# EAGLE board drill-rev-1_p (EAGLE 6.5.0)
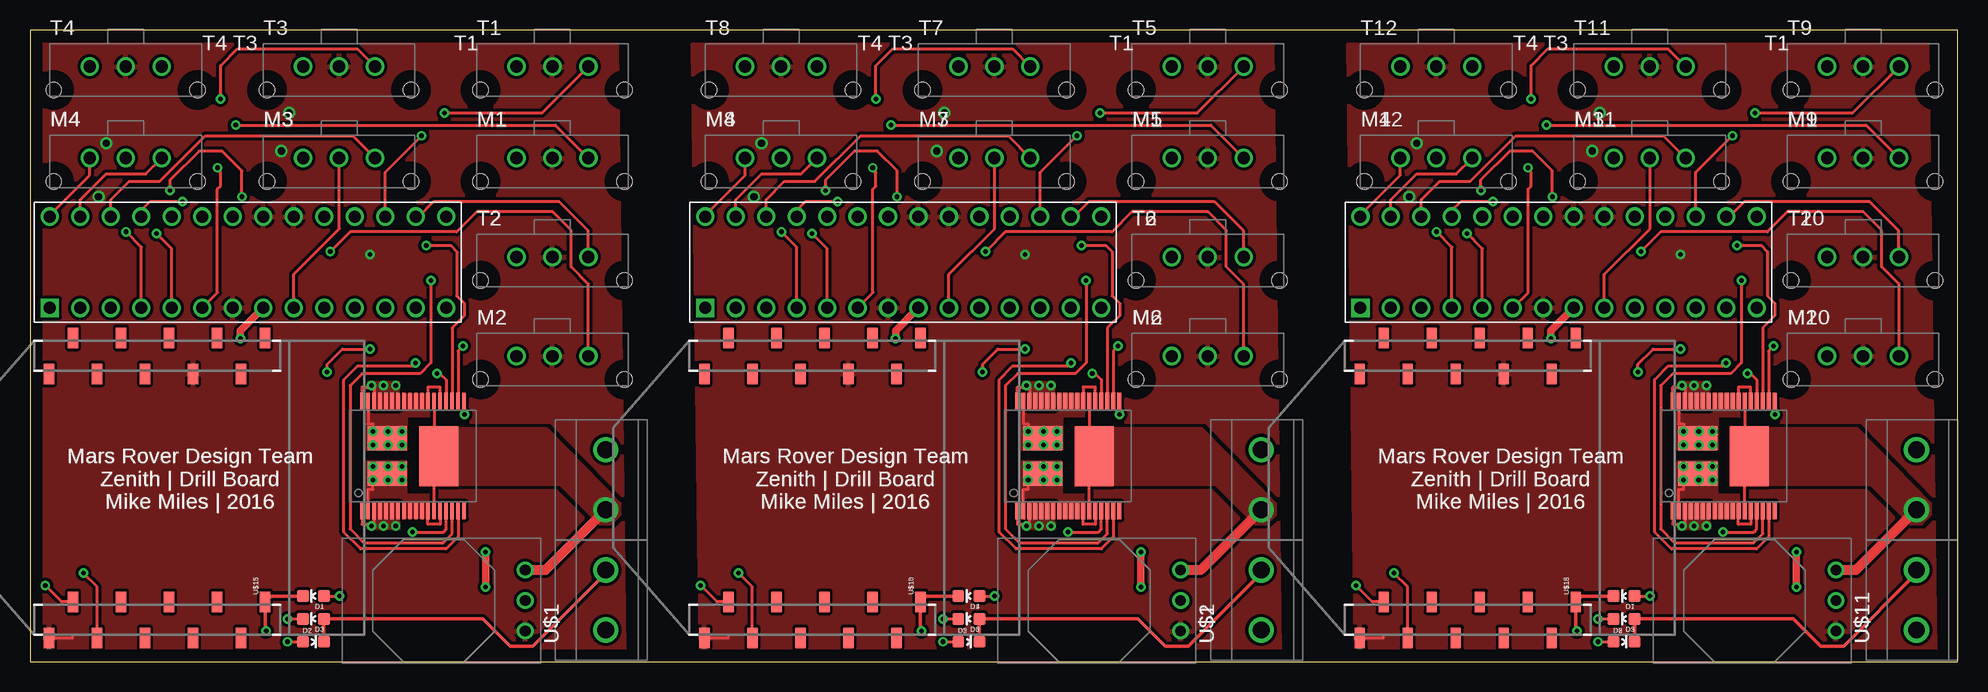
[diagram p0: board, top side]
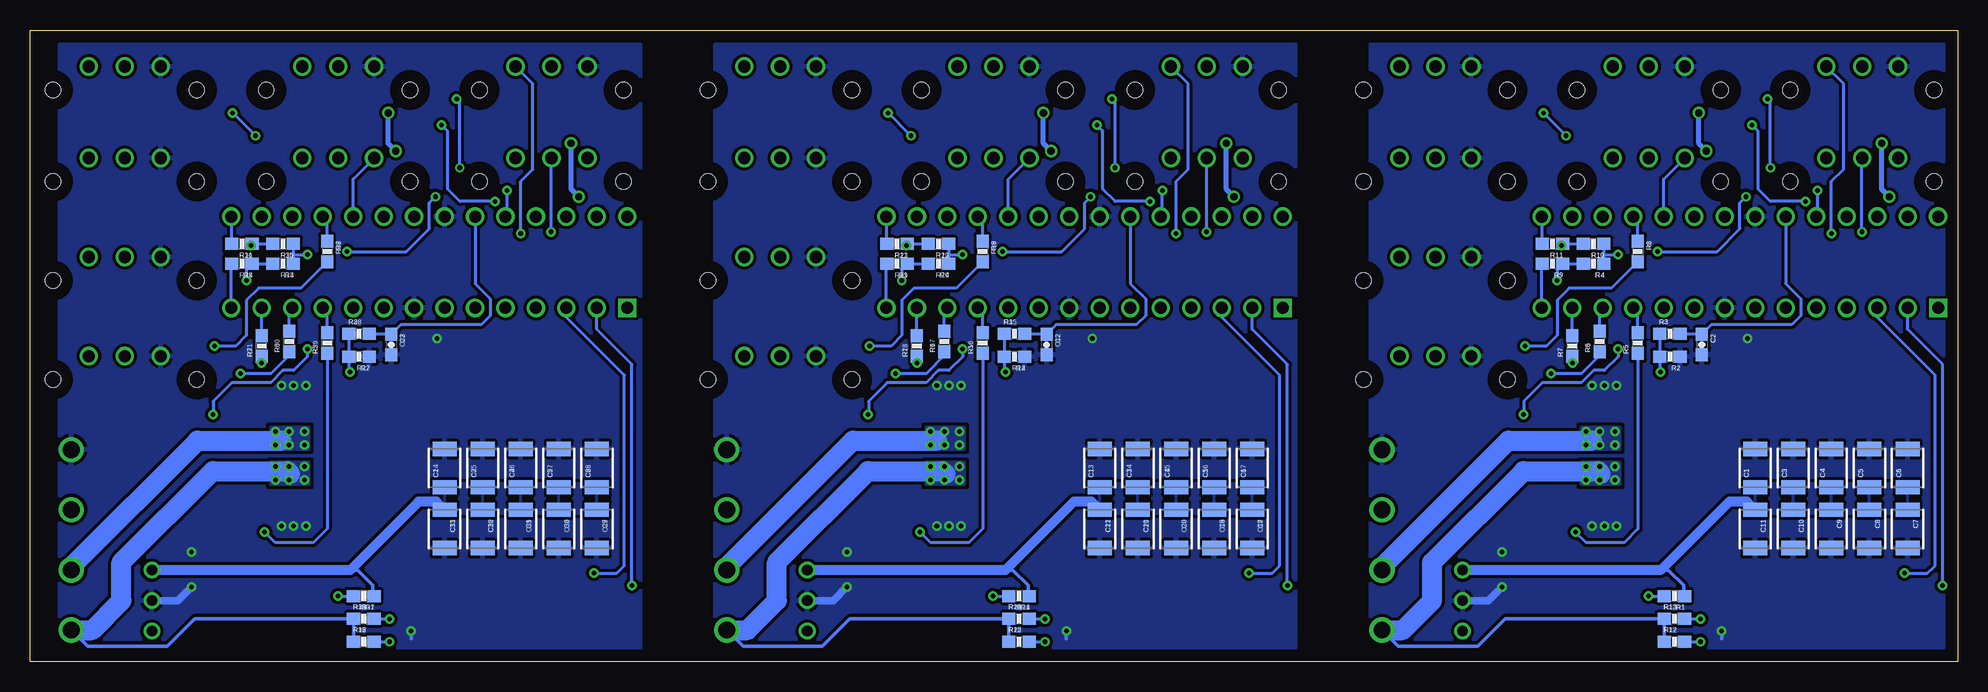
[diagram p1: board, bottom side, seen from below]

Size 160.66 x 52.63 mm. Coordinates in mm from the lower left corner, seen from the top.
Outline: 160.66,52.63 0,52.63 0,0 160.66,0 160.66,52.63
Copper layers (1*16): Top 0.035mm / dielectric 1.5mm / Bottom 0.035mm
Design rules "default *": minimum track width 6mil, minimum drill 10mil, track to track 5mil, track to pad 5mil, pad to pad 5mil, via to via 5mil, smd to smd 5mil, copper to edge 40mil, drill to drill 8mil, minimum pad ring 10mil, minimum via ring 8mil, stop-mask expansion 4mil, vias tented up to drill 0mil, thermal gap 10mil

## Footprints (pad centres in the part's own frame; a part is rotated, then mirrored left to right if it is on the bottom)
1210 = smd 1.2 x 2: 1 -1.6,0; 2 1.6,0
0603-CAP = smd 1.1 x 1: 1 -0.85,0; 2 0.85,0
LED-0603 = smd 1 x 1: A 0,-0.877; C 0,0.877
MOLEX0436500328 = drill 1.016: P$1 9.322,2.464; P$2 6.325,2.464; P$3 3.327,2.464 | hole 1.27: 0.33,0.508; 12.319,0.508
0603-RES = smd 1.1 x 1: 1 -0.85,0; 2 0.85,0
OKI-78SR_HORIZ = drill 0.889: 1 0,0; 2 -2.54,0; 3 -5.08,0
TE_2POS-5MM_SCREW_TERM = drill 1.4: P$1 2.5,3.45; P$2 7.5,3.45
POWERSSO-36_TP = smd 0.322 x 1.45: P$1 1,-0.75; P$2 1.5,-0.75; P$3 2,-0.75; P$4 2.5,-0.75; P$5 3,-0.75; P$6 3.5,-0.75; P$7 4,-0.75; P$8 4.5,-0.75; P$9 5,-0.75; P$10 5.5,-0.75; P$11 6,-0.75; P$12 6.5,-0.75; P$13 7,-0.75; P$14 7.5,-0.75; P$15 8,-0.75; P$16 8.5,-0.75; P$17 9,-0.75; P$18 9.5,-0.75; P$19 9.5,8.35; P$20 9,8.35; P$21 8.5,8.35; P$22 8,8.35; P$23 7.5,8.35; P$24 7,8.35; P$25 6.5,8.35; P$26 6,8.35; P$27 5.5,8.35; P$28 5,8.35; P$29 4.5,8.35; P$30 4,8.35; P$31 3.5,8.35; P$32 3,8.35; P$33 2.5,8.35; P$34 2,8.35; P$35 1.5,8.35; P$36 1,8.35 | smd 3.25 x 5: SLUG1 7.391,3.785 | smd 3.25 x 2: SLUG2 3.099,2.311; SLUG3 3.099,5.283
DIP_SKT_ATMEGA = drill 1 square: P$1 0,0 | drill 1: P$2 0,-2.54; P$3 0,-5.08; P$4 0,-7.62; P$5 0,-10.16; P$6 0,-12.7; P$7 0,-15.24; P$8 0,-17.78; P$9 0,-20.32; P$10 0,-22.86; P$11 0,-25.4; P$12 0,-27.94; P$13 0,-30.48; P$14 0,-33.02; P$15 7.62,-33.02; P$16 7.62,-30.48; P$17 7.62,-27.94; P$18 7.62,-25.4; P$19 7.62,-22.86; P$20 7.62,-20.32; P$21 7.62,-17.78; P$22 7.62,-15.24; P$23 7.62,-12.7; P$24 7.62,-10.16; P$25 7.62,-7.62; P$26 7.62,-5.08; P$27 7.62,-2.54; P$28 7.62,0
XBEE_802.15.4_SMD = smd 1.7 x 0.85: 1 -13.77,20; 2 -10.77,18; 3 -13.77,16; 4 -10.77,14; 5 -13.77,12; 6 -10.77,10; 7 -13.77,8; 8 -10.77,6; 9 -13.77,4; 10 -10.77,2; 11 11.23,2; 12 8.23,4; 13 11.23,6; 14 8.23,8; 15 11.23,10; 16 8.23,12; 17 11.23,14; 18 8.23,16; 19 11.23,18; 20 8.23,20

## Placement (x,y rotation side)
C1  47uf  [1210]  16.89,16.13 90 bottom
C2  33nF  [0603-CAP]  21.34,26.42 270 bottom
C3  47uf  [1210]  13.72,16.13 90 bottom
C4  47uf  [1210]  10.54,16.13 90 bottom
C5  47uf  [1210]  7.37,16.13 90 bottom
C6  47uf  [1210]  4.19,16.13 90 bottom
C7  47uf  [1210]  4.19,11.05 270 bottom
C8  47uf  [1210]  7.37,11.05 270 bottom
C9  47uf  [1210]  10.54,11.05 270 bottom
C10  47uf  [1210]  13.72,11.05 270 bottom
C11  47uf  [1210]  16.89,11.05 270 bottom
C12  33nF  [0603-CAP]  75.95,26.42 270 bottom
C13  47uf  [1210]  71.5,16.13 90 bottom
C14  47uf  [1210]  68.33,16.13 90 bottom
C15  47uf  [1210]  65.15,16.13 90 bottom
C16  47uf  [1210]  61.98,16.13 90 bottom
C17  47uf  [1210]  58.8,16.13 90 bottom
C18  47uf  [1210]  58.8,11.05 270 bottom
C19  47uf  [1210]  61.98,11.05 270 bottom
C20  47uf  [1210]  65.15,11.05 270 bottom
C21  47uf  [1210]  68.33,11.05 270 bottom
C22  47uf  [1210]  71.5,11.05 270 bottom
C23  33nF  [0603-CAP]  130.56,26.42 270 bottom
C24  47uf  [1210]  126.11,16.13 90 bottom
C25  47uf  [1210]  122.94,16.13 90 bottom
C26  47uf  [1210]  119.76,16.13 90 bottom
C27  47uf  [1210]  116.59,16.13 90 bottom
C28  47uf  [1210]  113.41,16.13 90 bottom
C29  47uf  [1210]  113.41,11.05 270 bottom
C30  47uf  [1210]  116.59,11.05 270 bottom
C31  47uf  [1210]  119.76,11.05 270 bottom
C32  47uf  [1210]  122.94,11.05 270 bottom
C33  47uf  [1210]  126.11,11.05 270 bottom
D1  red  [LED-0603]  23.62,5.46 90 top
D2  red  [LED-0603]  23.62,1.65 270 top
D3  green  [LED-0603]  23.62,3.56 90 top
D4  red  [LED-0603]  78.23,5.46 90 top
D5  red  [LED-0603]  78.23,1.65 270 top
D6  green  [LED-0603]  78.23,3.56 90 top
D7  red  [LED-0603]  132.84,5.46 90 top
D8  red  [LED-0603]  132.84,1.65 270 top
D9  green  [LED-0603]  132.84,3.56 90 top
M1  M03VERT  [MOLEX0436500328]  37.21,39.5 0 top
M2  M03VERT  [MOLEX0436500328]  37.21,22.99 0 top
M3  M03VERT  [MOLEX0436500328]  19.43,39.5 0 top
M4  M03VERT  [MOLEX0436500328]  1.65,39.5 0 top
M5  M03VERT  [MOLEX0436500328]  91.82,39.5 0 top
M6  M03VERT  [MOLEX0436500328]  91.82,22.99 0 top
M7  M03VERT  [MOLEX0436500328]  74.04,39.5 0 top
M8  M03VERT  [MOLEX0436500328]  56.26,39.5 0 top
M9  M03VERT  [MOLEX0436500328]  146.43,39.5 0 top
M10  M03VERT  [MOLEX0436500328]  146.43,22.99 0 top
M11  M03VERT  [MOLEX0436500328]  128.65,39.5 0 top
M12  M03VERT  [MOLEX0436500328]  110.87,39.5 0 top
R1  1K  [0603-RES]  23.62,5.46 180 bottom
R2  1.5K  [0603-RES]  24,25.4 180 bottom
R3  10K  [0603-RES]  24,27.3 0 bottom
R4  3K3  [0603-RES]  30.35,33.15 180 bottom
R5  1K  [0603-RES]  26.67,26.54 90 bottom
R6  1K  [0603-RES]  29.84,26.67 90 bottom
R7  1K  [0603-RES]  32.13,26.29 90 bottom
R8  10k  [0603-RES]  26.67,34.16 270 bottom
R9  1K  [0603-RES]  33.78,33.15 180 bottom
R10  3K3  [0603-RES]  30.35,34.8 180 bottom
R11  1K  [0603-RES]  33.78,34.8 180 bottom
R12  1K  [0603-RES]  23.62,1.65 0 bottom
R13  1K  [0603-RES]  23.62,3.56 0 bottom
R14  1.5K  [0603-RES]  78.61,25.4 180 bottom
R15  10K  [0603-RES]  78.61,27.3 0 bottom
R16  1K  [0603-RES]  81.28,26.54 90 bottom
R17  1K  [0603-RES]  84.45,26.67 90 bottom
R18  1K  [0603-RES]  86.74,26.29 90 bottom
R19  10k  [0603-RES]  81.28,34.16 270 bottom
R20  3K3  [0603-RES]  84.96,33.15 180 bottom
R21  1K  [0603-RES]  88.39,33.15 180 bottom
R22  3K3  [0603-RES]  84.96,34.8 180 bottom
R23  1K  [0603-RES]  88.39,34.8 180 bottom
R24  1K  [0603-RES]  78.23,5.46 180 bottom
R25  1K  [0603-RES]  78.23,1.65 0 bottom
R26  1K  [0603-RES]  78.23,3.56 0 bottom
R27  1.5K  [0603-RES]  133.22,25.4 180 bottom
R28  10K  [0603-RES]  133.22,27.3 0 bottom
R29  1K  [0603-RES]  135.89,26.54 90 bottom
R30  1K  [0603-RES]  139.06,26.67 90 bottom
R31  1K  [0603-RES]  141.35,26.29 90 bottom
R32  10k  [0603-RES]  135.89,34.16 270 bottom
R33  3K3  [0603-RES]  139.57,33.15 180 bottom
R34  1K  [0603-RES]  143,33.15 180 bottom
R35  3K3  [0603-RES]  139.57,34.8 180 bottom
R36  1K  [0603-RES]  143,34.8 180 bottom
R37  1K  [0603-RES]  132.84,5.46 180 bottom
R38  1K  [0603-RES]  132.84,1.65 0 bottom
R39  1K  [0603-RES]  132.84,3.56 0 bottom
T1  M03VERT  [MOLEX0436500328]  37.21,47.12 0 top
T2  M03VERT  [MOLEX0436500328]  37.21,31.24 0 top
T3  M03VERT  [MOLEX0436500328]  19.43,47.12 0 top
T4  M03VERT  [MOLEX0436500328]  1.65,47.12 0 top
T5  M03VERT  [MOLEX0436500328]  91.82,47.12 0 top
T6  M03VERT  [MOLEX0436500328]  91.82,31.24 0 top
T7  M03VERT  [MOLEX0436500328]  74.04,47.12 0 top
T8  M03VERT  [MOLEX0436500328]  56.26,47.12 0 top
T9  M03VERT  [MOLEX0436500328]  146.43,47.12 0 top
T10  M03VERT  [MOLEX0436500328]  146.43,31.24 0 top
T11  M03VERT  [MOLEX0436500328]  128.65,47.12 0 top
T12  M03VERT  [MOLEX0436500328]  110.87,47.12 0 top
U$1  Q_OKI-78SR  [OKI-78SR_HORIZ]  41.27,7.62 90 top
U$2  Q_OKI-78SR  [OKI-78SR_HORIZ]  95.89,7.62 90 top
U$3  TE_2POS-5MM_SCREW_TERM  [TE_2POS-5MM_SCREW_TERM]  51.44,0.13 90 top
U$4  TE_2POS-5MM_SCREW_TERM  [TE_2POS-5MM_SCREW_TERM]  106.05,0.13 90 top
U$5  TE_2POS-5MM_SCREW_TERM  [TE_2POS-5MM_SCREW_TERM]  51.44,10.16 90 top
U$6  VNH5XXX_HBRIDGEVNH5050A  [POWERSSO-36_TP]  26.67,13.34 0 top
U$7  TE_2POS-5MM_SCREW_TERM  [TE_2POS-5MM_SCREW_TERM]  106.05,10.16 90 top
U$8  VNH5XXX_HBRIDGEVNH5050A  [POWERSSO-36_TP]  81.28,13.34 0 top
U$9  DIP_SKT_ATMEGA  [DIP_SKT_ATMEGA]  56.26,29.46 90 top
U$10  XBEE_802.15.4SMD  [XBEE_802.15.4_SMD]  76.2,15.75 90 top
U$11  Q_OKI-78SR  [OKI-78SR_HORIZ]  150.5,7.62 90 top
U$12  TE_2POS-5MM_SCREW_TERM  [TE_2POS-5MM_SCREW_TERM]  160.66,0.13 90 top
U$13  DIP_SKT_ATMEGA  [DIP_SKT_ATMEGA]  1.65,29.46 90 top
U$14  TE_2POS-5MM_SCREW_TERM  [TE_2POS-5MM_SCREW_TERM]  160.66,10.16 90 top
U$15  XBEE_802.15.4SMD  [XBEE_802.15.4_SMD]  21.59,15.75 90 top
U$16  VNH5XXX_HBRIDGEVNH5050A  [POWERSSO-36_TP]  135.89,13.34 0 top
U$17  DIP_SKT_ATMEGA  [DIP_SKT_ATMEGA]  110.87,29.46 90 top
U$18  XBEE_802.15.4SMD  [XBEE_802.15.4_SMD]  130.81,15.75 90 top

## Library data of the parts
C1-C33 = SparkFun-Passives
D1-D9 = SparkFun-LED
M1-M12 T1-T12 U$3-U$5 U$7 U$9 U$12-U$14 U$17 = MRDT-Connectors
R1-R39 = SparkFun-Resistors
U$1 U$2 U$11 = MRDT-2015-PowerBoard
U$6 U$8 U$16 = MRDT-PowerICs
U$10 U$15 U$18 = MRDT-RF

## Nets
+3V1: M5.P$2 M6.P$2 R20.1 R22.1 T5.P$2 T6.P$2 T7.P$2 T8.P$2 U$2.3 U$9.P$7 U$9.P$20 U$9.P$21 U$10.1 U$10.14
+3V2: M9.P$2 M10.P$2 R33.1 R35.1 T9.P$2 T10.P$2 T11.P$2 T12.P$2 U$11.3 U$17.P$7 U$17.P$20 U$17.P$21 U$18.1 U$18.14
+3V3: M1.P$2 M2.P$2 R4.1 R10.1 T1.P$2 T2.P$2 T3.P$2 T4.P$2 U$1.3 U$13.P$7 U$13.P$20 U$13.P$21 U$15.1 U$15.14
+12V: C1.1 C3.1 C4.1 C5.1 C6.1 C7.1 C8.1 C9.1 C10.1 C11.1 R1.1 U$1.1 U$5.P$1 U$6.P$13 U$6.P$24 U$6.SLUG1
+12V1: C13.1 C14.1 C15.1 C16.1 C17.1 C18.1 C19.1 C20.1 C21.1 C22.1 R24.1 U$2.1 U$7.P$1 U$8.P$13 U$8.P$24 U$8.SLUG1
+12V2: C24.1 C25.1 C26.1 C27.1 C28.1 C29.1 C30.1 C31.1 C32.1 C33.1 R37.1 U$11.1 U$14.P$1 U$16.P$13 U$16.P$24 U$16.SLUG1
CS: C2.1 R3.2 U$13.P$23
CS1: C12.1 R15.2 U$9.P$23
CS2: C23.1 R28.2 U$17.P$23
CS_DIS: R8.1 U$13.P$18
CS_DIS1: R19.1 U$9.P$18
CS_DIS2: R32.1 U$17.P$18
D1: M3.P$3 U$13.P$19
D2: M3.P$2 U$13.P$9
D3: M4.P$3 U$13.P$28
D4: M4.P$2 U$13.P$4
D5: M7.P$3 U$9.P$19
D6: M7.P$2 U$9.P$9
D7: M8.P$3 U$9.P$28
D8: M8.P$2 U$9.P$4
D9: M11.P$3 U$17.P$19
D10: M11.P$2 U$17.P$9
D11: M12.P$3 U$17.P$28
D12: M12.P$2 U$17.P$4
ENA: R9.2 U$13.P$14
ENA1: R21.2 U$9.P$14
ENA2: R34.2 U$17.P$14
ENB: R11.2 U$13.P$15
ENB1: R23.2 U$9.P$15
ENB2: R36.2 U$17.P$15
GND: C1.2 C2.2 C3.2 C4.2 C5.2 C6.2 C7.2 C8.2 C9.2 C10.2 C11.2 D1.C M1.P$3 M2.P$3 R2.1 T1.P$3 T2.P$3 T3.P$3 T4.P$3 U$1.2 U$5.P$2 U$6.P$1 U$6.P$3 U$6.P$4 U$6.P$5 U$6.P$6 U$6.P$7 U$6.P$30 U$6.P$31 U$6.P$32 U$6.P$33 U$6.P$34 U$6.P$36 U$13.P$8 U$13.P$22 U$15.10
GND1: C12.2 C13.2 C14.2 C15.2 C16.2 C17.2 C18.2 C19.2 C20.2 C21.2 C22.2 D4.C M5.P$3 M6.P$3 R14.1 T5.P$3 T6.P$3 T7.P$3 T8.P$3 U$2.2 U$7.P$2 U$8.P$1 U$8.P$3 U$8.P$4 U$8.P$5 U$8.P$6 U$8.P$7 U$8.P$30 U$8.P$31 U$8.P$32 U$8.P$33 U$8.P$34 U$8.P$36 U$9.P$8 U$9.P$22 U$10.10
GND2: C23.2 C24.2 C25.2 C26.2 C27.2 C28.2 C29.2 C30.2 C31.2 C32.2 C33.2 D7.C M9.P$3 M10.P$3 R27.1 T9.P$3 T10.P$3 T11.P$3 T12.P$3 U$11.2 U$14.P$2 U$16.P$1 U$16.P$3 U$16.P$4 U$16.P$5 U$16.P$6 U$16.P$7 U$16.P$30 U$16.P$31 U$16.P$32 U$16.P$33 U$16.P$34 U$16.P$36 U$17.P$8 U$17.P$22 U$18.10
INA: R5.2 U$13.P$11
INA1: R16.2 U$9.P$11
INA2: R29.2 U$17.P$11
INB: R6.2 U$13.P$12
INB1: R17.2 U$9.P$12
INB2: R30.2 U$17.P$12
MOIST_1: M1.P$1 U$13.P$25
MOIST_2: M2.P$1 U$13.P$24
MOIST_3: M3.P$1 U$13.P$26
MOIST_4: M4.P$1 U$13.P$27
MOIST_5: M5.P$1 U$9.P$25
MOIST_6: M6.P$1 U$9.P$24
MOIST_7: M7.P$1 U$9.P$26
MOIST_8: M8.P$1 U$9.P$27
MOIST_9: M9.P$1 U$17.P$25
MOIST_10: M10.P$1 U$17.P$24
MOIST_11: M11.P$1 U$17.P$26
MOIST_12: M12.P$1 U$17.P$27
N$1: R20.2 R21.1 U$8.P$16
N$2: R4.2 R9.1 U$6.P$16
N$3: R2.2 R3.1 U$6.P$19
N$4: D1.A R1.2
N$5: D2.A R12.2
N$6: R22.2 R23.1 U$8.P$21
N$7: R10.2 R11.1 U$6.P$21
N$8: R5.1 U$6.P$15
N$9: R6.1 U$6.P$22
N$10: R7.1 U$6.P$17
N$11: R8.2 U$6.P$20
N$12: D3.C R13.2
N$13: R14.2 R15.1 U$8.P$19
N$14: R16.1 U$8.P$15
N$15: R17.1 U$8.P$22
N$16: R18.1 U$8.P$17
N$17: R19.2 U$8.P$20
N$18: D4.A R24.2
N$19: D5.A R25.2
N$20: D6.C R26.2
N$21: R33.2 R34.1 U$16.P$16
N$22: R35.2 R36.1 U$16.P$21
N$23: R27.2 R28.1 U$16.P$19
N$24: R29.1 U$16.P$15
N$25: R30.1 U$16.P$22
N$26: R31.1 U$16.P$17
N$27: R32.2 U$16.P$20
N$28: D7.A R37.2
N$29: D8.A R38.2
N$30: D9.C R39.2
OUTA: R12.1 R13.1 U$3.P$1 U$6.P$2 U$6.P$8 U$6.P$9 U$6.P$10 U$6.P$11 U$6.P$12 U$6.P$14 U$6.SLUG2
OUTA1: R25.1 R26.1 U$4.P$1 U$8.P$2 U$8.P$8 U$8.P$9 U$8.P$10 U$8.P$11 U$8.P$12 U$8.P$14 U$8.SLUG2
OUTA2: R38.1 R39.1 U$12.P$1 U$16.P$2 U$16.P$8 U$16.P$9 U$16.P$10 U$16.P$11 U$16.P$12 U$16.P$14 U$16.SLUG2
OUTB: D2.C D3.A U$3.P$2 U$6.P$23 U$6.P$25 U$6.P$26 U$6.P$27 U$6.P$28 U$6.P$29 U$6.P$35 U$6.SLUG3
OUTB1: D5.C D6.A U$4.P$2 U$8.P$23 U$8.P$25 U$8.P$26 U$8.P$27 U$8.P$28 U$8.P$29 U$8.P$35 U$8.SLUG3
OUTB2: D8.C D9.A U$12.P$2 U$16.P$23 U$16.P$25 U$16.P$26 U$16.P$27 U$16.P$28 U$16.P$29 U$16.P$35 U$16.SLUG3
PWM: R7.2 U$13.P$13
PWM1: R18.2 U$9.P$13
PWM2: R31.2 U$17.P$13
TEMP_1: T1.P$1 U$13.P$17
TEMP_2: T2.P$1 U$13.P$16
TEMP_3: T3.P$1 U$13.P$6
TEMP_4: T4.P$1 U$13.P$5
TEMP_5: T5.P$1 U$9.P$17
TEMP_6: T6.P$1 U$9.P$16
TEMP_7: T7.P$1 U$9.P$6
TEMP_8: T8.P$1 U$9.P$5
TEMP_9: T9.P$1 U$17.P$17
TEMP_10: T10.P$1 U$17.P$16
TEMP_11: T11.P$1 U$17.P$6
TEMP_12: T12.P$1 U$17.P$5
XB_DIN: U$13.P$3 U$15.3
XB_DIN1: U$9.P$3 U$10.3
XB_DIN2: U$17.P$3 U$18.3
XB_DOUT: U$13.P$2 U$15.2
XB_DOUT1: U$9.P$2 U$10.2
XB_DOUT2: U$17.P$2 U$18.2

## Tracks (layer width: path | path; a pad name or v marks a point on that pad's centre or on a via)
+3V1  (via drill 0.38, 0.6)
  Top 0.254: U$10.1 58.17,1.98 58.17,2.03
  Bottom 0.254: R22.1 R20.1 84.11,33.87 84.07,33.91 v82.93,33.91
  Bottom 0.406: v60.33,38.73 60.96,39.37 v60.96,43.18 | v75.56,42.55 76.2,43.18 v76.2,45.72
  pour Top (isolate 0.254, rank 6): 55.24,51.44 55.88,0.64 104.14,0.64 103.5,51.44
+3V2  (via drill 0.38, 0.6)
  Top 0.254: U$18.1 112.78,1.98 112.78,2.03
  Bottom 0.254: R35.1 R33.1 138.72,33.87 138.68,33.91 v137.54,33.91
  Bottom 0.406: v114.94,38.73 115.57,39.37 v115.57,43.18 | v130.18,42.55 130.81,43.18 v130.81,45.72
  pour Top (isolate 0.254, rank 6): 109.86,51.44 110.49,0.64 158.75,0.64 158.12,51.44
+3V3  (via drill 0.38, 0.6)
  Top 0.254: U$15.1 3.56,1.98 3.56,2.03
  Bottom 0.254: R10.1 R4.1 29.5,33.87 29.46,33.91 v28.32,33.91
  Bottom 0.406: v5.71,38.73 6.35,39.37 v6.35,43.18 | v20.95,42.55 21.59,43.18 v21.59,45.72
  pour Top (isolate 0.254, rank 6): 0.64,51.44 1.27,0.64 49.53,0.64 48.9,51.44
+12V
  Top 0.254: U$6.P$24 33.67,19.07 33.66,19.05 | U$6.P$13 33.67,15.22 | 33.67,15.22 33.66,15.24 | 33.67,15.22 33.67,16.73 U$6.SLUG1
  Top 0.813: U$5.P$1 42.95,7.62 U$1.1
  Bottom 0.305: 24.77,7.62 24.13,7.62 22.86,6.35 22.86,5.55 R1.1
  Bottom 0.813: C11.1 17.58,13.34 19.05,13.34 24.77,7.62 U$1.1
  pour Bottom: 3.56,12.32 17.53,12.32 17.53,14.86 3.56,14.86
  pour Top (no thermals): 33.66,19.43 43.05,19.43 49.15,13.21 49.15,12.19 48.39,11.43 47.5,11.43 44.2,14.73 35.31,14.73 33.66,16.38
+12V1
  Top 0.254: U$8.P$24 88.28,19.07 88.27,19.05 | U$8.P$13 88.28,15.22 | 88.28,15.22 88.27,15.24 | 88.28,15.22 88.28,16.73 U$8.SLUG1
  Top 0.813: U$7.P$1 97.56,7.62 U$2.1
  Bottom 0.305: 79.38,7.62 78.74,7.62 77.47,6.35 77.47,5.55 R24.1
  Bottom 0.813: C22.1 72.19,13.34 73.66,13.34 79.38,7.62 U$2.1
  pour Bottom: 58.17,12.32 72.14,12.32 72.14,14.86 58.17,14.86
  pour Top (no thermals): 88.27,19.43 97.66,19.43 103.76,13.21 103.76,12.19 103,11.43 102.11,11.43 98.81,14.73 89.92,14.73 88.27,16.38
+12V2
  Top 0.254: U$16.P$24 142.89,19.07 142.88,19.05 | U$16.P$13 142.89,15.22 | 142.89,15.22 142.88,15.24 | 142.89,15.22 142.89,16.73 U$16.SLUG1
  Top 0.813: U$14.P$1 152.16,7.62 U$11.1
  Bottom 0.305: 133.99,7.62 133.35,7.62 132.08,6.35 132.08,5.55 R37.1
  Bottom 0.813: C33.1 126.8,13.34 128.27,13.34 133.99,7.62 U$11.1
  pour Bottom: 112.78,12.32 126.75,12.32 126.75,14.86 112.78,14.86
  pour Top (no thermals): 142.88,19.43 152.27,19.43 158.37,13.21 158.37,12.19 157.61,11.43 156.72,11.43 153.42,14.73 144.53,14.73 142.88,16.38
CS
  Bottom 0.254: U$13.P$23 14.35,31.5 13.08,30.23 13.08,28.83 13.84,28.07 20.54,28.07 C2.1 23.11,27.27 R3.2
CS1
  Bottom 0.254: U$9.P$23 68.96,31.5 67.69,30.23 67.69,28.83 68.45,28.07 75.14,28.07 C12.1 77.72,27.27 R15.2
CS2
  Bottom 0.254: U$17.P$23 123.57,31.5 122.3,30.23 122.3,28.83 123.06,28.07 129.75,28.07 C23.1 132.33,27.27 R28.2
CS_DIS
  Bottom 0.254: R8.1 26.67,36.7 U$13.P$18
CS_DIS1
  Bottom 0.254: R19.1 81.28,36.7 U$9.P$18
CS_DIS2
  Bottom 0.254: R32.1 135.89,36.7 U$17.P$18
D1
  Bottom 0.254: U$13.P$19 24.51,40.21 M3.P$3
D2
  Top 0.254: U$13.P$9 21.97,32.26 25.78,36.07 25.78,41.94 M3.P$2
D3
  Top 0.254: M4.P$3 4.98,40.54 1.65,37.21 U$13.P$28
D4  (via drill 0.38)
  Top 0.254: U$13.P$4 9.27,34.54 v8,35.81
  Bottom 0.254: v8,35.81 8,41.94 M4.P$2
D5
  Bottom 0.254: U$9.P$19 79.12,40.21 M7.P$3
D6
  Top 0.254: U$9.P$9 76.58,32.26 80.39,36.07 80.39,41.94 M7.P$2
D7
  Top 0.254: M8.P$3 59.59,40.54 56.26,37.21 U$9.P$28
D8  (via drill 0.38)
  Top 0.254: U$9.P$4 63.88,34.54 v62.61,35.81
  Bottom 0.254: v62.61,35.81 62.61,41.94 M8.P$2
D9
  Bottom 0.254: U$17.P$19 133.73,40.21 M11.P$3
D10
  Top 0.254: U$17.P$9 131.19,32.26 135,36.07 135,41.94 M11.P$2
D11
  Top 0.254: M12.P$3 114.2,40.54 110.87,37.21 U$17.P$28
D12  (via drill 0.38)
  Top 0.254: U$17.P$4 118.49,34.54 v117.22,35.81
  Bottom 0.254: v117.22,35.81 117.22,41.94 M12.P$2
ENA
  Bottom 0.254: U$13.P$14 34.67,33.11 R9.2
ENA1
  Bottom 0.254: U$9.P$14 89.28,33.11 R21.2
ENA2
  Bottom 0.254: U$17.P$14 143.89,33.11 R34.2
ENB
  Bottom 0.254: U$13.P$15 34.67,34.84 R11.2
ENB1
  Bottom 0.254: U$9.P$15 89.28,34.84 R23.2
ENB2
  Bottom 0.254: U$17.P$15 143.89,34.84 R36.2
GND  (via drill 0.38)
  Top 0.254: U$6.P$1 27.67,11.45 27.69,11.43 28.7,11.43 28.7,12.55 U$6.P$3 | U$6.P$36 27.67,22.84 27.69,22.86 28.7,22.86 28.7,21.72 U$6.P$34
  Top 0.305: D1.C 20.07,5.46 U$15.10 19.59,2.63 v19.68,2.54
  Top 0.61: v17.53,26.92 17.53,27.56 U$13.P$8 | v37.97,6.22 v37.97,9.14
  Bottom 0.305: v19.68,2.54 19.68,1.91
  Bottom 0.61: U$1.2 39.12,5.08 v37.97,6.22
  other vias: 28.45,11.3 29.46,11.3 30.48,11.3 28.45,22.99 29.46,22.99 30.48,22.99
  pour Bottom (isolate 0.254, rank 6): 0.64,51.44 0.64,0.64 48.9,0.64 48.9,51.44
  pour Top (isolate 0.254, no thermals): 30.73,13.21 30.73,11.05 28.19,11.05 28.19,11.56 28.7,11.56 28.7,13.21
  pour Top (no thermals): 30.73,22.23 30.73,21.08 28.7,21.08 28.7,22.23
  pour Top (isolate 0.254, no thermals): 30.73,21.08 30.73,23.24 28.19,23.24 28.19,22.73 28.7,22.73 28.7,21.08
GND1  (via drill 0.38)
  Top 0.254: U$8.P$1 82.28,11.45 82.3,11.43 83.31,11.43 83.31,12.55 U$8.P$3 | U$8.P$36 82.28,22.84 82.3,22.86 83.31,22.86 83.31,21.72 U$8.P$34
  Top 0.305: D4.C 74.68,5.46 U$10.10 74.2,2.63 v74.3,2.54
  Top 0.61: v72.14,26.92 72.14,27.56 U$9.P$8 | v92.58,6.22 v92.58,9.14
  Bottom 0.305: v74.3,2.54 74.3,1.91
  Bottom 0.61: U$2.2 93.73,5.08 v92.58,6.22
  other vias: 83.06,11.3 84.07,11.3 85.09,11.3 83.06,22.99 84.07,22.99 85.09,22.99
  pour Bottom (isolate 0.254, rank 6): 55.24,51.44 55.24,0.64 103.5,0.64 103.5,51.44
  pour Top (isolate 0.254, no thermals): 85.34,13.21 85.34,11.05 82.8,11.05 82.8,11.56 83.31,11.56 83.31,13.21
  pour Top (no thermals): 85.34,22.23 85.34,21.08 83.31,21.08 83.31,22.23
  pour Top (isolate 0.254, no thermals): 85.34,21.08 85.34,23.24 82.8,23.24 82.8,22.73 83.31,22.73 83.31,21.08
GND2  (via drill 0.38)
  Top 0.254: U$16.P$1 136.89,11.45 136.91,11.43 137.92,11.43 137.92,12.55 U$16.P$3 | U$16.P$36 136.89,22.84 136.91,22.86 137.92,22.86 137.92,21.72 U$16.P$34
  Top 0.305: D7.C 129.29,5.46 U$18.10 128.81,2.63 v128.91,2.54
  Top 0.61: v126.75,26.92 126.75,27.56 U$17.P$8 | v147.19,6.22 v147.19,9.14
  Bottom 0.305: v128.91,2.54 128.91,1.91
  Bottom 0.61: U$11.2 148.34,5.08 v147.19,6.22
  other vias: 137.67,11.3 138.68,11.3 139.7,11.3 137.67,22.99 138.68,22.99 139.7,22.99
  pour Bottom (isolate 0.254, rank 6): 109.86,51.44 109.86,0.64 158.12,0.64 158.12,51.44
  pour Top (isolate 0.254, no thermals): 139.95,13.21 139.95,11.05 137.41,11.05 137.41,11.56 137.92,11.56 137.92,13.21
  pour Top (no thermals): 139.95,22.23 139.95,21.08 137.92,21.08 137.92,22.23
  pour Top (isolate 0.254, no thermals): 139.95,21.08 139.95,23.24 137.41,23.24 137.41,22.73 137.92,22.73 137.92,21.08
INA
  Bottom 0.254: R5.2 26.67,29.08 U$13.P$11
INA1
  Bottom 0.254: R16.2 81.28,29.08 U$9.P$11
INA2
  Bottom 0.254: R29.2 135.89,29.08 U$17.P$11
INB
  Bottom 0.254: R6.2 29.84,29.21 U$13.P$12
INB1
  Bottom 0.254: R17.2 84.45,29.21 U$9.P$12
INB2
  Bottom 0.254: R30.2 139.06,29.21 U$17.P$12
MOIST_1  (via drill 0.38)
  Top 0.254: U$13.P$25 9.27,37.59 10.03,38.35 v12.7,38.35 | v17.14,44.7 43.79,44.7 M1.P$1
  Bottom 0.254: v12.7,38.35 15.62,38.35 16.64,39.37 16.64,44.2 v17.14,44.7
MOIST_2  (via drill 0.38)
  Top 0.254: M2.P$1 46.53,31.45 45.09,32.89 45.09,35.94 43.56,37.47 37.21,37.47 35.56,35.81 26.67,35.81 v25.02,34.16 | v17.65,38.73 17.65,40.89 16,42.55 14.1,42.55 11.68,40.13 v11.68,39.24
  Bottom 0.254: v25.02,34.16 20.07,34.16 18.16,36.07 18.16,38.23 v17.65,38.73 | U$13.P$24 11.68,37.21 v11.68,39.24
MOIST_3
  Top 0.254: U$13.P$26 6.73,38.48 8.26,40.01 10.79,40.01 14.61,43.81 26.9,43.81 M3.P$1
MOIST_4
  Top 0.254: U$13.P$27 4.19,38.48 6.35,40.64 9.65,40.64 M4.P$1
MOIST_5  (via drill 0.38)
  Top 0.254: U$9.P$25 63.88,37.59 64.64,38.35 v67.31,38.35 | v71.75,44.7 98.4,44.7 M5.P$1
  Bottom 0.254: v67.31,38.35 70.23,38.35 71.25,39.37 71.25,44.2 v71.75,44.7
MOIST_6  (via drill 0.38)
  Top 0.254: M6.P$1 101.14,31.45 99.69,32.89 99.69,35.94 98.17,37.47 91.82,37.47 90.17,35.81 81.28,35.81 v79.63,34.16 | v72.26,38.73 72.26,40.89 70.61,42.55 68.71,42.55 66.29,40.13 v66.29,39.24
  Bottom 0.254: v79.63,34.16 74.68,34.16 72.77,36.07 72.77,38.23 v72.26,38.73 | U$9.P$24 66.29,37.21 v66.29,39.24
MOIST_7
  Top 0.254: U$9.P$26 61.34,38.48 62.87,40.01 65.41,40.01 69.22,43.81 81.51,43.81 M7.P$1
MOIST_8
  Top 0.254: U$9.P$27 58.8,38.48 60.96,40.64 64.26,40.64 M8.P$1
MOIST_9  (via drill 0.38)
  Top 0.254: U$17.P$25 118.49,37.59 119.25,38.35 v121.92,38.35 | v126.36,44.7 153.01,44.7 M9.P$1
  Bottom 0.254: v121.92,38.35 124.84,38.35 125.86,39.37 125.86,44.2 v126.36,44.7
MOIST_10  (via drill 0.38)
  Top 0.254: M10.P$1 155.75,31.45 154.31,32.89 154.31,35.94 152.78,37.47 146.43,37.47 144.78,35.81 135.89,35.81 v134.24,34.16 | v126.87,38.73 126.87,40.89 125.22,42.55 123.32,42.55 120.9,40.13 v120.9,39.24
  Bottom 0.254: v134.24,34.16 129.29,34.16 127.38,36.07 127.38,38.23 v126.87,38.73 | U$17.P$24 120.9,37.21 v120.9,39.24
MOIST_11
  Top 0.254: U$17.P$26 115.95,38.48 117.47,40.01 120.02,40.01 123.83,43.81 136.12,43.81 M11.P$1
MOIST_12
  Top 0.254: U$17.P$27 113.41,38.48 115.57,40.64 118.87,40.64 M12.P$1
N$1  (via drill 0.38)
  Top 0.254: v88.01,31.75 88.01,24.89 87.12,24 82.3,24 81.28,22.99 81.28,11.05 82.42,9.91 89.03,9.91 89.79,10.67 89.79,12.58 U$8.P$16
  Bottom 0.254: R20.2 R21.1 88.01,32.68 v88.01,31.75
N$2  (via drill 0.38)
  Top 0.254: v33.4,31.75 33.4,24.89 32.51,24 27.69,24 26.67,22.99 26.67,11.05 27.81,9.91 34.42,9.91 35.18,10.67 35.18,12.58 U$6.P$16
  Bottom 0.254: R4.2 R9.1 33.4,32.68 v33.4,31.75
N$3  (via drill 0.38)
  Top 0.254: v24.77,24.13 24.77,24.77 26.04,26.04 v28.32,26.04 | v36.2,20.57 36.2,21.66 U$6.P$19
  Bottom 0.254: R3.1 R2.2 24.85,24.22 v24.77,24.13 | v28.32,26.04 28.32,25.4 29.46,24.26 30.35,24.26 31.37,23.24 34.61,23.24 U$6.P$19 36.17,20.6 v36.2,20.57
N$4  (via drill 0.38)
  Top 0.254: D1.A v25.78,5.46
  Bottom 0.254: v25.78,5.46 R1.2
N$5  (via drill 0.38)
  Top 0.254: v21.46,1.65 D2.A
  Bottom 0.254: R12.2 v21.46,1.65
N$6  (via drill 0.38)
  Top 0.254: U$8.P$21 89.79,27.81 90.81,28.83 90.81,29.84 90.17,30.48 90.17,34.16 89.66,34.67 v87.63,34.67
  Bottom 0.254: R22.2 R23.1 87.63,34.71 v87.63,34.67
N$7  (via drill 0.38)
  Top 0.254: U$6.P$21 35.18,27.81 36.2,28.83 36.2,29.84 35.56,30.48 35.56,34.16 35.05,34.67 v33.02,34.67
  Bottom 0.254: R10.2 R11.1 33.02,34.71 v33.02,34.67
N$8  (via drill 0.38)
  Top 0.254: v31.88,10.79 34.42,10.79 34.67,11.05 U$6.P$15
  Bottom 0.254: R5.1 26.67,11.05 27.81,9.91 30.99,9.91 v31.88,10.79
N$9  (via drill 0.38)
  Top 0.254: v33.91,24 34.16,24 34.67,23.5 U$6.P$22
  Bottom 0.254: R6.1 29.84,25.53 31.37,24 v33.91,24
N$10  (via drill 0.38)
  Top 0.254: U$6.P$17 35.67,10.4 34.67,9.4 27.56,9.4 26.16,10.79 26.16,23.5 27.3,24.64 31.88,24.64 v32.13,24.89
  Bottom 0.254: v32.13,24.89 R7.1
N$11  (via drill 0.38)
  Top 0.254: v36.07,26.29 35.67,25.89 U$6.P$20
  Bottom 0.254: R8.2 28.87,31.11 32.38,31.11 33.4,30.1 33.4,27.18 34.29,26.29 v36.07,26.29
N$12  (via drill 0.38)
  Top 0.254: v21.46,3.56 D3.C
  Bottom 0.254: R13.2 v21.46,3.56
N$13  (via drill 0.38)
  Top 0.254: v79.38,24.13 79.38,24.77 80.64,26.04 v82.93,26.04 | v90.81,20.57 90.81,21.66 U$8.P$19
  Bottom 0.254: R15.1 R14.2 79.46,24.22 v79.38,24.13 | v82.93,26.04 82.93,25.4 84.07,24.26 84.96,24.26 85.98,23.24 89.22,23.24 U$8.P$19 90.78,20.6 v90.81,20.57
N$14  (via drill 0.38)
  Top 0.254: v86.49,10.79 89.03,10.79 89.28,11.05 U$8.P$15
  Bottom 0.254: R16.1 81.28,11.05 82.42,9.91 85.6,9.91 v86.49,10.79
N$15  (via drill 0.38)
  Top 0.254: v88.52,24 88.77,24 89.28,23.5 U$8.P$22
  Bottom 0.254: R17.1 84.45,25.53 85.98,24 v88.52,24
N$16  (via drill 0.38)
  Top 0.254: U$8.P$17 90.28,10.4 89.28,9.4 82.17,9.4 80.77,10.79 80.77,23.5 81.92,24.64 86.49,24.64 v86.74,24.89
  Bottom 0.254: v86.74,24.89 R18.1
N$17  (via drill 0.38)
  Top 0.254: v90.68,26.29 90.28,25.89 U$8.P$20
  Bottom 0.254: R19.2 83.48,31.11 87,31.11 88.01,30.1 88.01,27.18 88.9,26.29 v90.68,26.29
N$18  (via drill 0.38)
  Top 0.254: D4.A v80.39,5.46
  Bottom 0.254: v80.39,5.46 R24.2
N$19  (via drill 0.38)
  Top 0.254: v76.07,1.65 D5.A
  Bottom 0.254: R25.2 v76.07,1.65
N$20  (via drill 0.38)
  Top 0.254: v76.07,3.56 D6.C
  Bottom 0.254: R26.2 v76.07,3.56
N$21  (via drill 0.38)
  Top 0.254: v142.62,31.75 142.62,24.89 141.73,24 136.91,24 135.89,22.99 135.89,11.05 137.03,9.91 143.64,9.91 144.4,10.67 144.4,12.58 U$16.P$16
  Bottom 0.254: R33.2 R34.1 142.62,32.68 v142.62,31.75
N$22  (via drill 0.38)
  Top 0.254: U$16.P$21 144.4,27.81 145.41,28.83 145.41,29.84 144.78,30.48 144.78,34.16 144.27,34.67 v142.24,34.67
  Bottom 0.254: R35.2 R36.1 142.24,34.71 v142.24,34.67
N$23  (via drill 0.38)
  Top 0.254: v133.99,24.13 133.99,24.77 135.25,26.04 v137.54,26.04 | v145.41,20.57 145.41,21.66 U$16.P$19
  Bottom 0.254: R28.1 R27.2 134.07,24.22 v133.99,24.13 | v137.54,26.04 137.54,25.4 138.68,24.26 139.57,24.26 140.59,23.24 143.83,23.24 U$16.P$19 145.39,20.6 v145.41,20.57
N$24  (via drill 0.38)
  Top 0.254: v141.1,10.79 143.64,10.79 143.89,11.05 U$16.P$15
  Bottom 0.254: R29.1 135.89,11.05 137.03,9.91 140.21,9.91 v141.1,10.79
N$25  (via drill 0.38)
  Top 0.254: v143.13,24 143.38,24 143.89,23.5 U$16.P$22
  Bottom 0.254: R30.1 139.06,25.53 140.59,24 v143.13,24
N$26  (via drill 0.38)
  Top 0.254: U$16.P$17 144.89,10.4 143.89,9.4 136.78,9.4 135.38,10.79 135.38,23.5 136.53,24.64 141.1,24.64 v141.35,24.89
  Bottom 0.254: v141.35,24.89 R31.1
N$27  (via drill 0.38)
  Top 0.254: v145.29,26.29 144.89,25.89 U$16.P$20
  Bottom 0.254: R32.2 138.09,31.11 141.6,31.11 142.62,30.1 142.62,27.18 143.51,26.29 v145.29,26.29
N$28  (via drill 0.38)
  Top 0.254: D7.A v135,5.46
  Bottom 0.254: v135,5.46 R37.2
N$29  (via drill 0.38)
  Top 0.254: v130.68,1.65 D8.A
  Bottom 0.254: R38.2 v130.68,1.65
N$30  (via drill 0.38)
  Top 0.254: v130.68,3.56 D9.C
  Bottom 0.254: R39.2 v130.68,3.56
OUTA  (via drill 0.38)
  Top 0.254: U$6.P$14 34.17,11.44 34.16,11.43 33.15,11.43 33.15,12.56 U$6.P$12 | U$6.P$2 28.17,14.35 28.57,14.35 v28.57,15.11
  Bottom 0.305: R12.1 R13.1 37.72,3.56 40.01,1.27 46.63,1.27 U$3.P$1
  Bottom 1.676: U$3.P$1 46.27,2.63 43.81,5.08 43.81,8.26 36.2,15.88 30,15.88 U$6.SLUG2
  other vias: 30.99,16.26 30.99,15.11 29.84,15.11 29.84,16.26 28.57,16.26
  pour Top (isolate 0.254, rank 2, no thermals): 34.16,12.06 34.16,13.84 31.37,13.84 31.37,16.64 28.07,16.64 28.07,12.06
  pour Bottom: 28.19,16.64 28.19,14.73 31.37,14.73 31.37,16.64
OUTA1  (via drill 0.38)
  Top 0.254: U$8.P$14 88.78,11.44 88.77,11.43 87.76,11.43 87.76,12.56 U$8.P$12 | U$8.P$2 82.78,14.35 83.19,14.35 v83.19,15.11
  Bottom 0.305: R25.1 R26.1 92.33,3.56 94.61,1.27 101.24,1.27 U$4.P$1
  Bottom 1.676: U$4.P$1 100.88,2.63 98.42,5.08 98.42,8.26 90.81,15.88 84.61,15.88 U$8.SLUG2
  other vias: 85.6,16.26 85.6,15.11 84.45,15.11 84.45,16.26 83.19,16.26
  pour Top (isolate 0.254, rank 2, no thermals): 88.77,12.06 88.77,13.84 85.98,13.84 85.98,16.64 82.68,16.64 82.68,12.06
  pour Bottom: 82.8,16.64 82.8,14.73 85.98,14.73 85.98,16.64
OUTA2  (via drill 0.38)
  Top 0.254: U$16.P$14 143.39,11.44 143.38,11.43 142.37,11.43 142.37,12.56 U$16.P$12 | U$16.P$2 137.39,14.35 137.79,14.35 v137.79,15.11
  Bottom 0.305: R38.1 R39.1 146.94,3.56 149.22,1.27 155.85,1.27 U$12.P$1
  Bottom 1.676: U$12.P$1 155.49,2.63 153.03,5.08 153.03,8.26 145.41,15.88 139.22,15.88 U$16.SLUG2
  other vias: 140.21,16.26 140.21,15.11 139.06,15.11 139.06,16.26 137.79,16.26
  pour Top (isolate 0.254, rank 2, no thermals): 143.38,12.06 143.38,13.84 140.59,13.84 140.59,16.64 137.29,16.64 137.29,12.06
  pour Bottom: 137.41,16.64 137.41,14.73 140.59,14.73 140.59,16.64
OUTB  (via drill 0.38)
  Top 0.254: U$6.P$23 34.17,22.73 34.16,22.86 33.15,22.86 33.15,21.71 U$6.P$25 | U$6.P$35 28.17,19.8 28.57,19.8 v28.57,19.18
  Top 0.305: D2.C D3.A 37.72,3.56 40.01,1.27 41.91,1.27 47.98,7.34 U$3.P$2
  Bottom 1.676: U$3.P$2 47.98,7.89 37.47,18.41 30.48,18.41
  other vias: 30.99,19.18 30.99,18.03 29.84,18.03 29.84,19.18 28.57,18.03
  pour Top (isolate 0.254, no thermals): 34.16,22.23 34.16,20.45 31.37,20.45 31.37,17.65 28.07,17.65 28.07,22.23
  pour Bottom: 28.19,19.56 28.19,17.65 31.37,17.65 31.37,19.56
OUTB1  (via drill 0.38)
  Top 0.254: U$8.P$23 88.78,22.73 88.77,22.86 87.76,22.86 87.76,21.71 U$8.P$25 | U$8.P$35 82.78,19.8 83.19,19.8 v83.19,19.18
  Top 0.305: D5.C D6.A 92.33,3.56 94.61,1.27 96.52,1.27 102.59,7.34 U$4.P$2
  Bottom 1.676: U$4.P$2 102.59,7.89 92.08,18.41 85.09,18.41
  other vias: 85.6,19.18 85.6,18.03 84.45,18.03 84.45,19.18 83.19,18.03
  pour Top (isolate 0.254, no thermals): 88.77,22.23 88.77,20.45 85.98,20.45 85.98,17.65 82.68,17.65 82.68,22.23
  pour Bottom: 82.8,19.56 82.8,17.65 85.98,17.65 85.98,19.56
OUTB2  (via drill 0.38)
  Top 0.254: U$16.P$23 143.39,22.73 143.38,22.86 142.37,22.86 142.37,21.71 U$16.P$25 | U$16.P$35 137.39,19.8 137.79,19.8 v137.79,19.18
  Top 0.305: D8.C D9.A 146.94,3.56 149.22,1.27 151.13,1.27 157.21,7.34 U$12.P$2
  Bottom 1.676: U$12.P$2 157.21,7.89 146.69,18.41 139.7,18.41
  other vias: 140.21,19.18 140.21,18.03 139.06,18.03 139.06,19.18 137.79,18.03
  pour Top (isolate 0.254, no thermals): 143.38,22.23 143.38,20.45 140.59,20.45 140.59,17.65 137.29,17.65 137.29,22.23
  pour Bottom: 137.41,19.56 137.41,17.65 140.59,17.65 140.59,19.56
PWM
  Bottom 0.254: R7.2 U$13.P$13
PWM1
  Bottom 0.254: R18.2 U$9.P$13
PWM2
  Bottom 0.254: R31.2 U$17.P$13
TEMP_1  (via drill 0.38)
  Top 0.254: U$13.P$17 29.59,40.77 v32.64,43.81 | v34.54,45.72 42.67,45.72 T1.P$1
  Bottom 0.254: v32.64,43.81 v34.54,45.72
TEMP_2
  Top 0.254: U$13.P$16 32.38,37.08 33.66,38.35 44.07,38.35 46.48,35.94 46.48,33.76 T2.P$1
TEMP_3  (via drill 0.38)
  Top 0.254: U$13.P$6 15.62,30.73 15.62,39.37 15.88,39.62 15.88,40.77 v15.62,41.15 | v15.88,46.86 15.88,49.66 17.27,51.05 27.28,51.05 T3.P$1
  Bottom 0.254: v15.62,41.15 15.62,46.61 v15.88,46.86
TEMP_4  (via drill 0.38)
  Top 0.254: U$13.P$5 11.81,34.42 v10.54,35.69
  Bottom 0.254: v10.54,35.69 10.54,40.01 9.53,41.02 9.53,48.13 T4.P$1
TEMP_5  (via drill 0.38)
  Top 0.254: U$9.P$17 84.2,40.77 v87.25,43.81 | v89.15,45.72 97.28,45.72 T5.P$1
  Bottom 0.254: v87.25,43.81 v89.15,45.72
TEMP_6
  Top 0.254: U$9.P$16 87,37.08 88.27,38.35 98.68,38.35 101.09,35.94 101.09,33.76 T6.P$1
TEMP_7  (via drill 0.38)
  Top 0.254: U$9.P$6 70.23,30.73 70.23,39.37 70.48,39.62 70.48,40.77 v70.23,41.15 | v70.48,46.86 70.48,49.66 71.88,51.05 81.89,51.05 T7.P$1
  Bottom 0.254: v70.23,41.15 70.23,46.61 v70.48,46.86
TEMP_8  (via drill 0.38)
  Top 0.254: U$9.P$5 66.42,34.42 v65.15,35.69
  Bottom 0.254: v65.15,35.69 65.15,40.01 64.14,41.02 64.14,48.13 T8.P$1
TEMP_9  (via drill 0.38)
  Top 0.254: U$17.P$17 138.81,40.77 v141.86,43.81 | v143.76,45.72 151.89,45.72 T9.P$1
  Bottom 0.254: v141.86,43.81 v143.76,45.72
TEMP_10
  Top 0.254: U$17.P$16 141.6,37.08 142.88,38.35 153.29,38.35 155.7,35.94 155.7,33.76 T10.P$1
TEMP_11  (via drill 0.38)
  Top 0.254: U$17.P$6 124.84,30.73 124.84,39.37 125.09,39.62 125.09,40.77 v124.84,41.15 | v125.09,46.86 125.09,49.66 126.49,51.05 136.5,51.05 T11.P$1
  Bottom 0.254: v124.84,41.15 124.84,46.61 v125.09,46.86
TEMP_12  (via drill 0.38)
  Top 0.254: U$17.P$5 121.03,34.42 v119.76,35.69
  Bottom 0.254: v119.76,35.69 119.76,40.01 118.75,41.02 118.75,48.13 T12.P$1
XB_DIN  (via drill 0.38)
  Top 0.254: U$15.3 5.59,6.22 v4.45,7.37
  Bottom 0.254: v4.45,7.37 2.54,7.37 1.91,8 1.91,23.88 6.73,28.7 U$13.P$3
XB_DIN1  (via drill 0.38)
  Top 0.254: U$10.3 60.2,6.22 v59.05,7.37
  Bottom 0.254: v59.05,7.37 57.15,7.37 56.52,8 56.52,23.88 61.34,28.7 U$9.P$3
XB_DIN2  (via drill 0.38)
  Top 0.254: U$18.3 114.81,6.22 v113.67,7.37
  Bottom 0.254: v113.67,7.37 111.76,7.37 111.12,8 111.12,23.88 115.95,28.7 U$17.P$3
XB_DOUT  (via drill 0.38)
  Top 0.254: U$15.2 2.64,4.98 v1.27,6.35
  Bottom 0.254: v1.27,6.35 1.27,24.77 4.19,27.69 U$13.P$2
XB_DOUT1  (via drill 0.38)
  Top 0.254: U$10.2 57.25,4.98 v55.88,6.35
  Bottom 0.254: v55.88,6.35 55.88,24.77 58.8,27.69 U$9.P$2
XB_DOUT2  (via drill 0.38)
  Top 0.254: U$18.2 111.86,4.98 v110.49,6.35
  Bottom 0.254: v110.49,6.35 110.49,24.77 113.41,27.69 U$17.P$2

## Text on the board
tPlace: Mars Rover Design Team / Zenith | Drill Board / Mike Miles | 2016 | Mars Rover Design Team / Zenith | Drill Board / Mike Miles | 2016 | Mars Rover Design Team / Zenith | Drill Board / Mike Miles | 2016
_tNames: T4 | T3 | T1 | T4 | T3 | T1 | T4 | T3 | T1 | M4 | M3 | M1 | M4 | M3 | M1 | M4 | M3 | M1 | T2 | T2 | T2 | M2 | M2 | M2 | Mars Rover Design Team / Zenith | Drill Board / Mike Miles | 2016 | Mars Rover Design Team / Zenith | Drill Board / Mike Miles | 2016 | Mars Rover Design Team / Zenith | Drill Board / Mike Miles | 2016 | U$15 | U$15 | U$15 | D1 | D1 | D1 | D3 | D3 | D3 | D2 | U$1 | D2 | U$1 | D2 | U$1
_bNames: R8 | R8 | R8 | R10 | R11 | R10 | R11 | R10 | R11 | R4 | R9 | R4 | R9 | R4 | R9 | R3 | R3 | R3 | C2 | C2 | C2 | R5 | R6 | R5 | R6 | R5 | R6 | R2 | R7 | R2 | R7 | R2 | R7 | C6 | C5 | C4 | C3 | C1 | C6 | C5 | C4 | C3 | C1 | C6 | C5 | C4 | C3 | C1 | C7 | C8 | C9 | C10 | C11 | C7 | C8 | C9 | C10 | C11 | C7 | C8 | C9 | C10 | C11 | R1 | R1 | R1 | R13 | R13 | R13 | R12 | R12 | R12